# EAGLE board Program_Infinite_Thick (EAGLE 9.6.2)
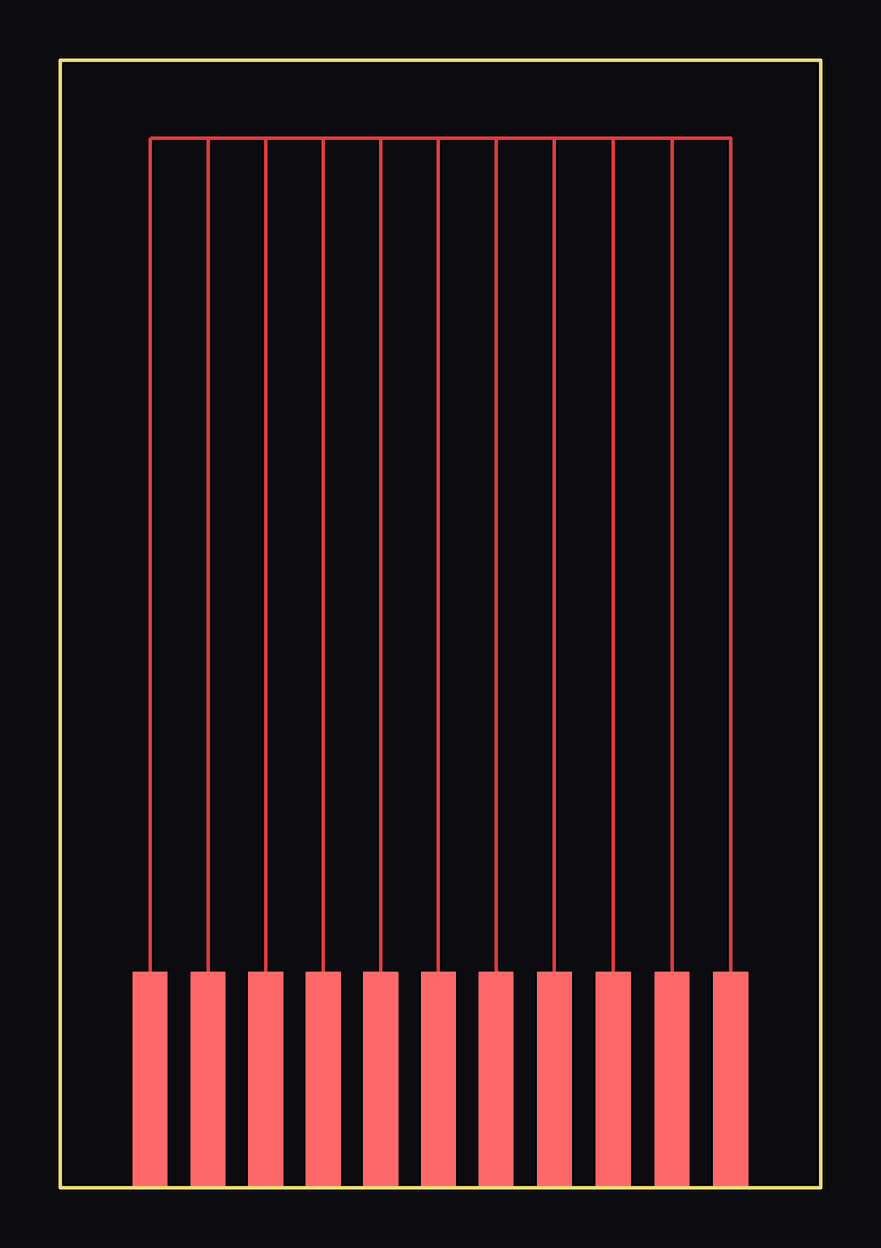
[diagram p0: board, top side]

Size 31.7 x 47 mm. Coordinates in mm from the lower left corner, seen from the top.
Outline: 31.7,0 0,0 0,47 31.7,47 31.7,0
Copper layers (1*16): Top 0.035mm / dielectric 1.5mm / Bottom 0.035mm
Design rules "default": minimum track width 6mil, minimum drill 0.35mm, track to track 6mil, track to pad 6mil, pad to pad 6mil, via to via 6mil, smd to smd 6mil, copper to edge 40mil, drill to drill 6mil, minimum pad ring 10mil, minimum via ring 8mil, stop-mask expansion 4mil, vias tented up to drill 0mil, thermal gap 10mil

## Footprints (pad centres in the part's own frame; a part is rotated, then mirrored left to right if it is on the bottom)
PINEDGE = smd 1.45 x 9: P$1 0.75,0.5; P$2 3.168,0.5; P$3 5.568,0.5; P$4 7.968,0.5; P$5 10.368,0.5; P$6 12.768,0.5; P$7 15.168,0.5; P$8 17.604,0.5; P$9 20.05,0.5; P$10 22.5,0.5; P$11 24.95,0.5

## Placement (x,y rotation side)
U$1  PINEDGE  [PINEDGE]  3,4 0 top

## Library data of the parts
U$1 = pinedge

## Nets
N$2: U$1.P$1 U$1.P$2 U$1.P$3 U$1.P$4 U$1.P$5 U$1.P$6 U$1.P$7 U$1.P$8 U$1.P$9 U$1.P$10 U$1.P$11

## Tracks (layer width: path | path; a pad name or v marks a point on that pad's centre or on a via)
N$2
  Top 0.152: 3.73,4.52 U$1.P$1 3.75,43.7 3.8,43.75 6.15,43.75 | U$1.P$3 8.57,43.72 8.6,43.75 | U$1.P$4 10.97,43.67 11.05,43.75 | 15.85,4.6 U$1.P$6 15.77,43.72 15.8,43.75 | 18.22,9 18.17,9 U$1.P$7 18.17,43.72 18.2,43.75 | U$1.P$11 27.95,43.75 25.45,43.75 | 6.15,43.75 8.6,43.75 | 8.6,43.75 11.05,43.75 | 11.05,43.75 13.45,43.75 | 13.45,43.75 15.8,43.75 | 15.8,43.75 18.2,43.75 | 18.2,43.75 20.65,43.75 | 20.65,43.75 23.05,43.75 | 23.05,43.75 25.45,43.75 | 25.45,43.75 25.5,43.7 U$1.P$10 | U$1.P$9 23.05,43.75 | 20.65,43.75 20.6,43.7 U$1.P$8 | 13.45,43.75 13.37,43.67 U$1.P$5 | 6.15,43.75 6.17,43.73 U$1.P$2